# EAGLE board 00A-003 (EAGLE 9.6.2)
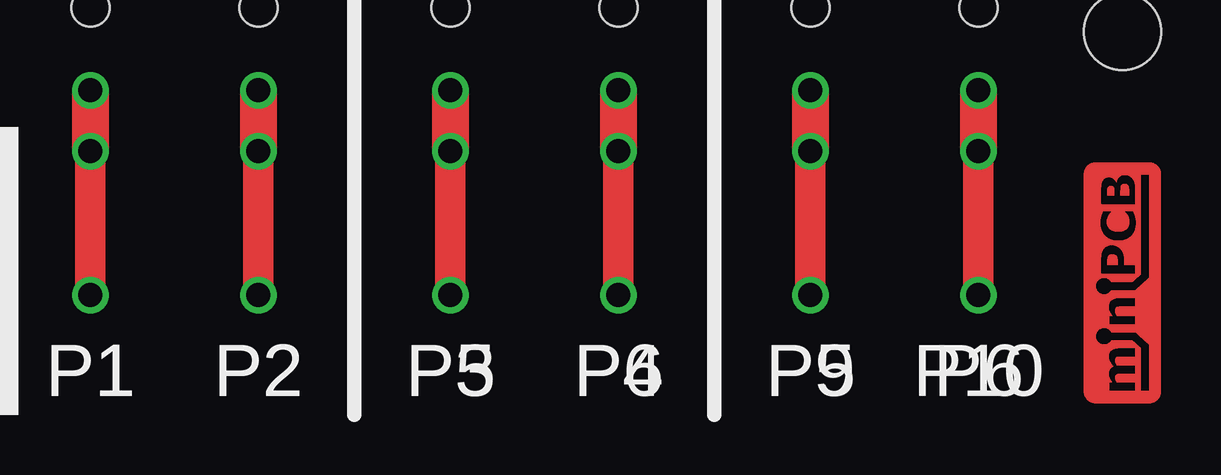
[diagram p0: board, top side]
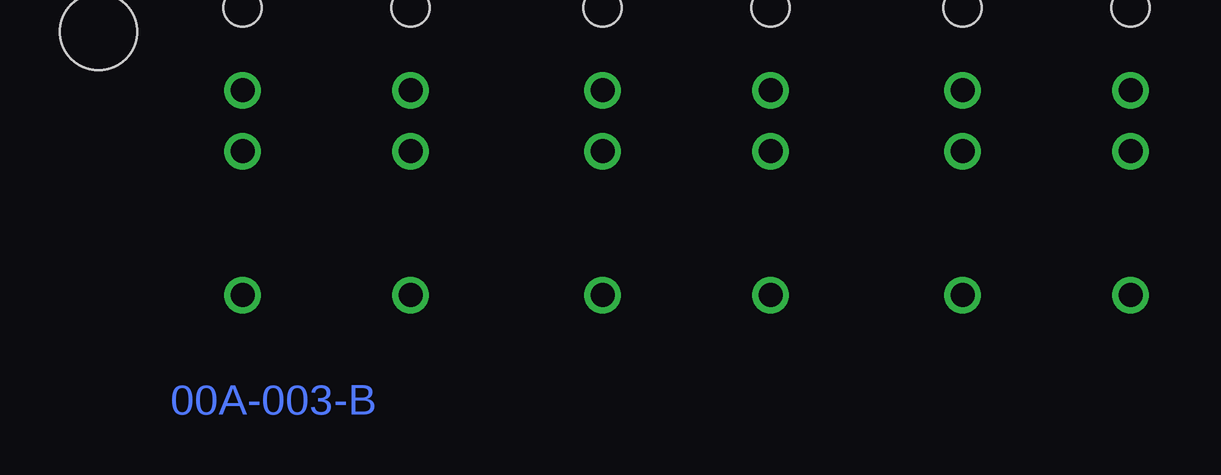
[diagram p1: board, bottom side, seen from below]

No outline drawn. Coordinates in mm, seen from the top.
Copper layers (1*16): Top 0.035mm / dielectric 1.5mm / Bottom 0.035mm
Design rules "default": minimum track width 10mil, minimum drill 24mil, track to track 8mil, track to pad 8mil, pad to pad 8mil, via to via 8mil, smd to smd 8mil, copper to edge 40mil, drill to drill 8mil, minimum pad ring 10mil, minimum via ring 8mil, stop-mask expansion 4mil, vias tented up to drill 0mil, thermal gap 10mil
Holes 1.6 mm at 9,18 16,18 24,18 31,18 39,18 46,18
Holes 3.2 mm at 3,17 52,17

## Footprints (pad centres in the part's own frame; a part is rotated, then mirrored left to right if it is on the bottom)
PINS_1_TESTPOINT_KE5000 = drill 1: 1 0,0
PINS_1_1MM = drill 1: 1 0,0; 2 2.54,0

## Placement (x,y rotation side)
P1  [PINS_1_TESTPOINT_KE5000]  9,6 180 top
P2  [PINS_1_TESTPOINT_KE5000]  16,6 180 top
P3  [PINS_1_1MM]  9,12 90 top
P4  [PINS_1_1MM]  16,12 90 top
P5  [PINS_1_TESTPOINT_KE5000]  24,6 180 top
P6  [PINS_1_TESTPOINT_KE5000]  31,6 180 top
P7  [PINS_1_1MM]  24,12 90 top
P8  [PINS_1_1MM]  31,12 90 top
P9  [PINS_1_TESTPOINT_KE5000]  39,6 180 top
P10  [PINS_1_TESTPOINT_KE5000]  46,6 180 top
P11  [PINS_1_1MM]  39,12 90 top
P12  [PINS_1_1MM]  46,12 90 top

## Library data of the parts
P1-P12 = nolan-utsa

## Nets
N$1: P1.1 P3.1 P3.2
N$2: P2.1 P4.1 P4.2
N$3: P5.1 P7.1 P7.2
N$4: P6.1 P8.1 P8.2
N$5: P9.1 P11.1 P11.2
N$6: P10.1 P12.1 P12.2

## Tracks (layer width: path | path; a pad name or v marks a point on that pad's centre or on a via)
N$1
  Top 1.27: P3.2 P3.1 P1.1
N$2
  Top 1.27: P4.2 P4.1 P2.1
N$3
  Top 1.27: P7.2 P7.1 P5.1
N$4
  Top 1.27: P8.2 P8.1 P6.1
N$5
  Top 1.27: P11.2 P11.1 P9.1
N$6
  Top 1.27: P12.2 P12.1 P10.1
(copper drawn outside any net)
  shapes: Top area x2199

## Text on the board
Bottom: 00A-003-B
_tPlace: P1 | P2 | P3 | P4 | P5 | P6